# EAGLE board PSU_PSB (EAGLE 7.2.0)
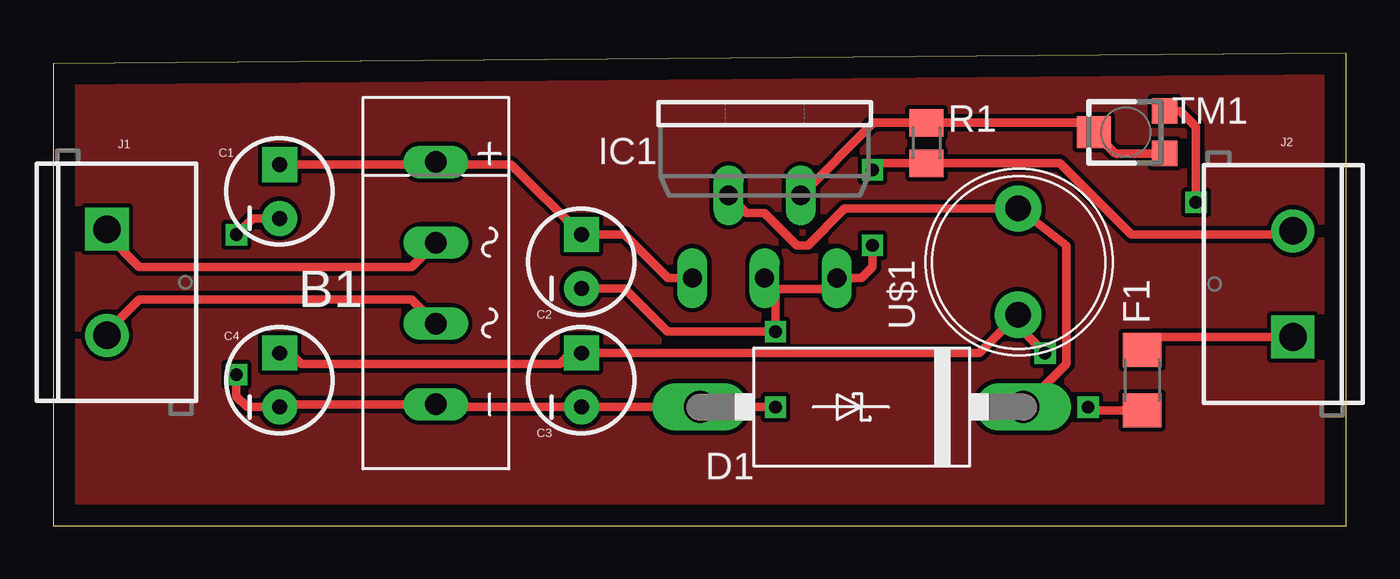
[diagram p0: board, top side]
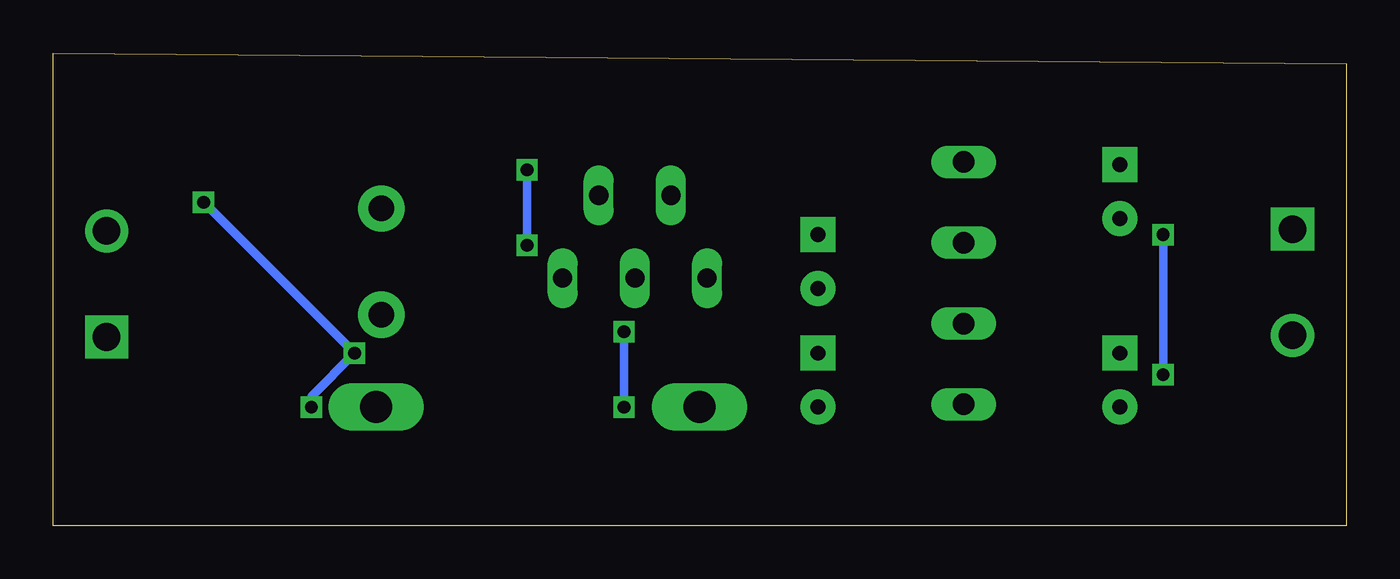
[diagram p1: board, bottom side, seen from below]

Size 60.94 x 22.28 mm. Coordinates in mm from the lower left corner, seen from the top.
Outline: 0,0 60.94,0 60.94,22.28 0,21.77 0,0
Copper layers (1*16): Top 0.035mm / dielectric 1.5mm / Bottom 0.035mm
Design rules "default": minimum track width 10mil, minimum drill 24mil, track to track 8mil, track to pad 8mil, pad to pad 8mil, via to via 8mil, smd to smd 8mil, copper to edge 40mil, drill to drill 8mil, minimum pad ring 10mil, minimum via ring 8mil, stop-mask expansion 4mil, vias tented up to drill 0mil, thermal gap 10mil

## Footprints (pad centres in the part's own frame; a part is rotated, then mirrored left to right if it is on the bottom)
2KBP = drill 1.016 long: + 5.715,0; - -5.715,0; AC1 -1.905,0; AC2 1.905,0
CPOL-RADIAL-10UF-25V = drill 0.7 pad 1.651 square: 1 1.27,0 | drill 0.7 pad 1.651: 2 -1.27,0
DO201T15 = drill 1.499 long: A 7.62,0; C -7.62,0
R1206 = smd 1.6 x 1.803: 1 -1.422,0; 2 1.422,0
TO220-51 = drill 0.9 long: 1 -3.4,-8.4; 2 -1.7,-4.5; 3 0,-8.4; 4 1.7,-4.5; 5 3.4,-8.4
SCREWTERMINAL-5MM-2 = drill 1.3 pad 2.032 square: 1 0,0 | drill 1.3 pad 2.032: 2 5,0
M0805 = smd 1.3 x 1.6: 1 -0.95,0; 2 0.95,0
TC33X = smd 1.2 x 1.2: 1 -1,-1.825; 3 1,-1.825 | smd 1.5 x 1.6: 2 0,1.5
6000 = drill 1.2 pad 2.184: 1 -2.5,0; 2 2.5,0

## Placement (x,y rotation side)
B1  3KBP06M-E4-51  [2KBP]  18.03,11.43 90 top
C1  4700uF  [CPOL-RADIAL-10UF-25V]  10.67,15.75 90 top
C2  100uF  [CPOL-RADIAL-10UF-25V]  24.89,12.45 90 top
C3  330uF  [CPOL-RADIAL-10UF-25V]  24.89,6.86 90 top
C4  100uF  [CPOL-RADIAL-10UF-25V]  10.67,6.86 90 top
D1  1N5822  [DO201T15]  38.1,5.59 180 top
F1  0697H2500-01  [R1206]  51.31,6.86 90 top
IC1  LM2596  [TO220-51]  33.53,20.07 0 top
J1  [SCREWTERMINAL-5MM-2]  2.54,13.97 270 top
J2  [SCREWTERMINAL-5MM-2]  58.42,8.89 90 top
R1  1.21k  [M0805]  41.15,18.03 90 top
TM1  50k  [TC33X]  50.55,18.54 90 top
U$1  300uH  [6000]  45.47,12.45 270 top

## Library data of the parts
B1 = rectifier
C1-C4 = SparkFun-Passives
D1 F1 R1 TM1 U$1 = adafruit
IC1 = linear
J1 J2 = SparkFun-Connectors; STOREFRONT_ID: PRT-08432

## Nets
20VACIN: B1.AC1 J1.2
GND: B1.- C1.2 C2.2 C3.2 C4.2 D1.A IC1.3 IC1.5 J2.2 R1.1
N$2: B1.AC2 J1.1
N$3: B1.+ C1.1 C2.1 IC1.1
N$4: IC1.4 R1.2 TM1.1 TM1.2
N$5: D1.C IC1.2 U$1.1
N$6: C3.1 C4.1 F1.1 TM1.3 U$1.2
N$8: F1.2 J2.1

## Tracks (layer width: path | path; a pad name or v marks a point on that pad's centre or on a via)
20VACIN
  Top 0.406: J1.2 2.54,9.14 4.06,10.67 16.89,10.67 B1.AC1
GND  (via drill 0.6)
  Top 0.406: v34.04,5.59 D1.A C3.2 18.16,5.59 B1.- 10.79,5.71 C4.2 9.14,5.59 8.64,6.1 v8.64,7.11 | 34.04,11.16 v34.04,9.14 28.96,9.14 26.92,11.18 C2.2 | 34.04,11.16 IC1.3 | 34.04,11.16 36.42,11.16 IC1.5 38.08,11.67 38.61,12.19 v38.61,13.21 | v38.61,16.76 38.93,17.08 R1.1 47.43,17.08 50.8,13.72 58.25,13.72 J2.2 | C1.2 9.4,14.48 v8.64,13.72
  Bottom 0.406: v34.04,5.59 v34.04,9.14 | v38.61,16.76 v38.61,13.21 | v8.64,13.72 v8.64,7.11
N$1
  pour Top: -1.02,22.35 -0.51,-0.51 61.47,0 61.47,22.86
N$2
  Top 0.406: J1.1 2.54,13.72 4.06,12.19 16.89,12.19 B1.AC2
N$3
  Top 0.406: C1.1 18.03,17.02 | 18.03,17.02 B1.+ | 18.03,17.02 21.59,17.02 C2.1 26.92,13.72 28.97,11.67 IC1.1
N$4
  Top 0.406: IC1.4 38.65,18.98 R1.2 48.6,18.98 TM1.2 50.05,17.54 TM1.1
N$5
  Top 0.406: D1.C 47.75,7.62 47.75,13.21 45.51,14.95 U$1.1 37.3,14.95 35.56,13.21 35.05,13.21 33.53,14.73 32.66,14.73 IC1.2
N$6  (via drill 0.6)
  Top 0.406: C4.1 11.18,8.13 11.68,7.62 23.88,7.62 24.38,8.13 C3.1 43.65,8.13 U$1.2 45.47,9.4 v46.74,8.13 | F1.1 48.92,5.44 v48.77,5.59 | TM1.3 53.1,19.54 53.85,18.8 v53.85,15.24
  Bottom 0.406: v48.77,5.59 48.77,6.1 v46.74,8.13 v53.85,15.24
N$8
  Top 0.406: J2.1 51.92,8.89 F1.2

## Text on the board
Document: Power Supply Rev. 1 / Nicholas Diggle